# Altium PCB RF3.PcbDoc
Units mil, origin at the board's own origin, x right, y up, seen from the top; angles counter-clockwise.
Board outline 3807 x 3056 mil, 2 copper layers (Top Layer, Bottom Layer); 74 components, 47 nets, 219 pads, 1161 vias.
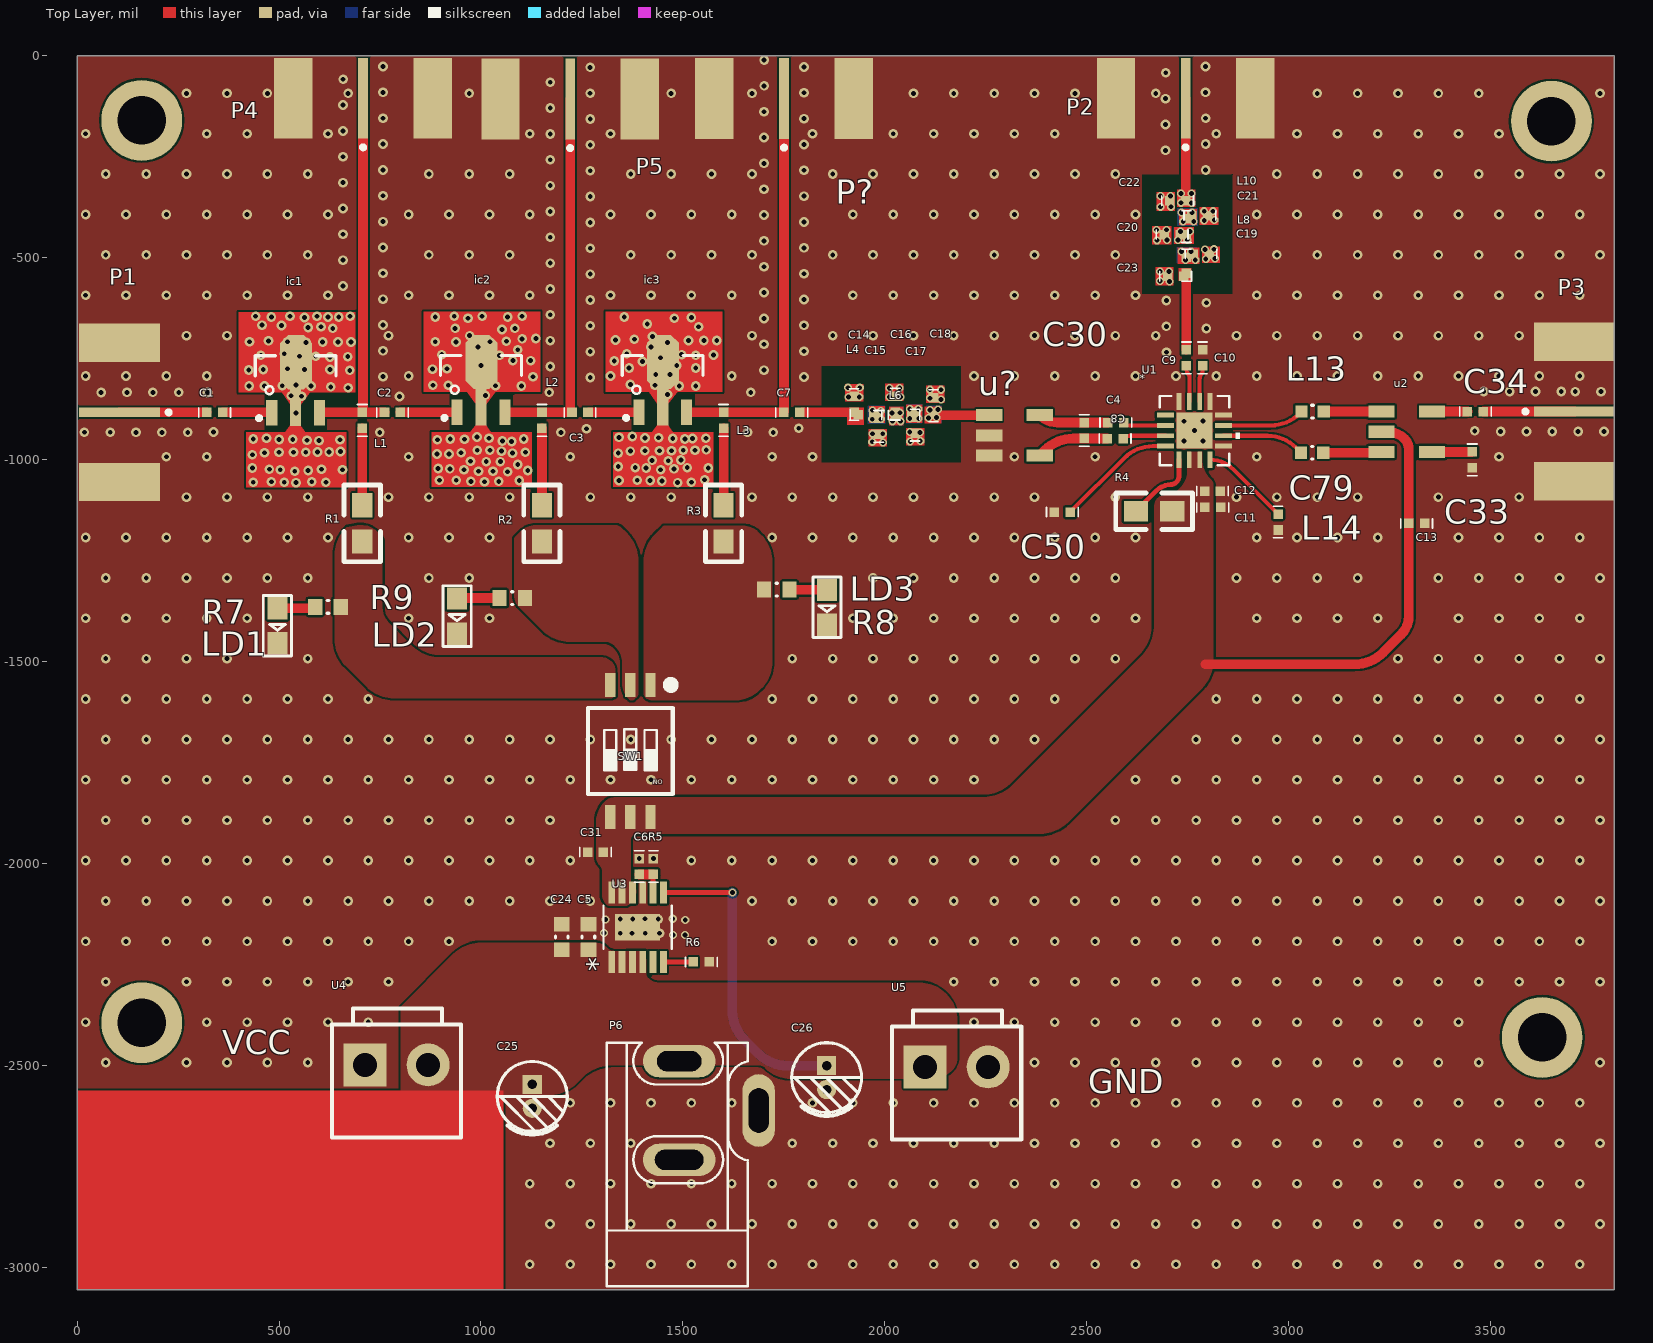
[diagram p0: Top Layer view]
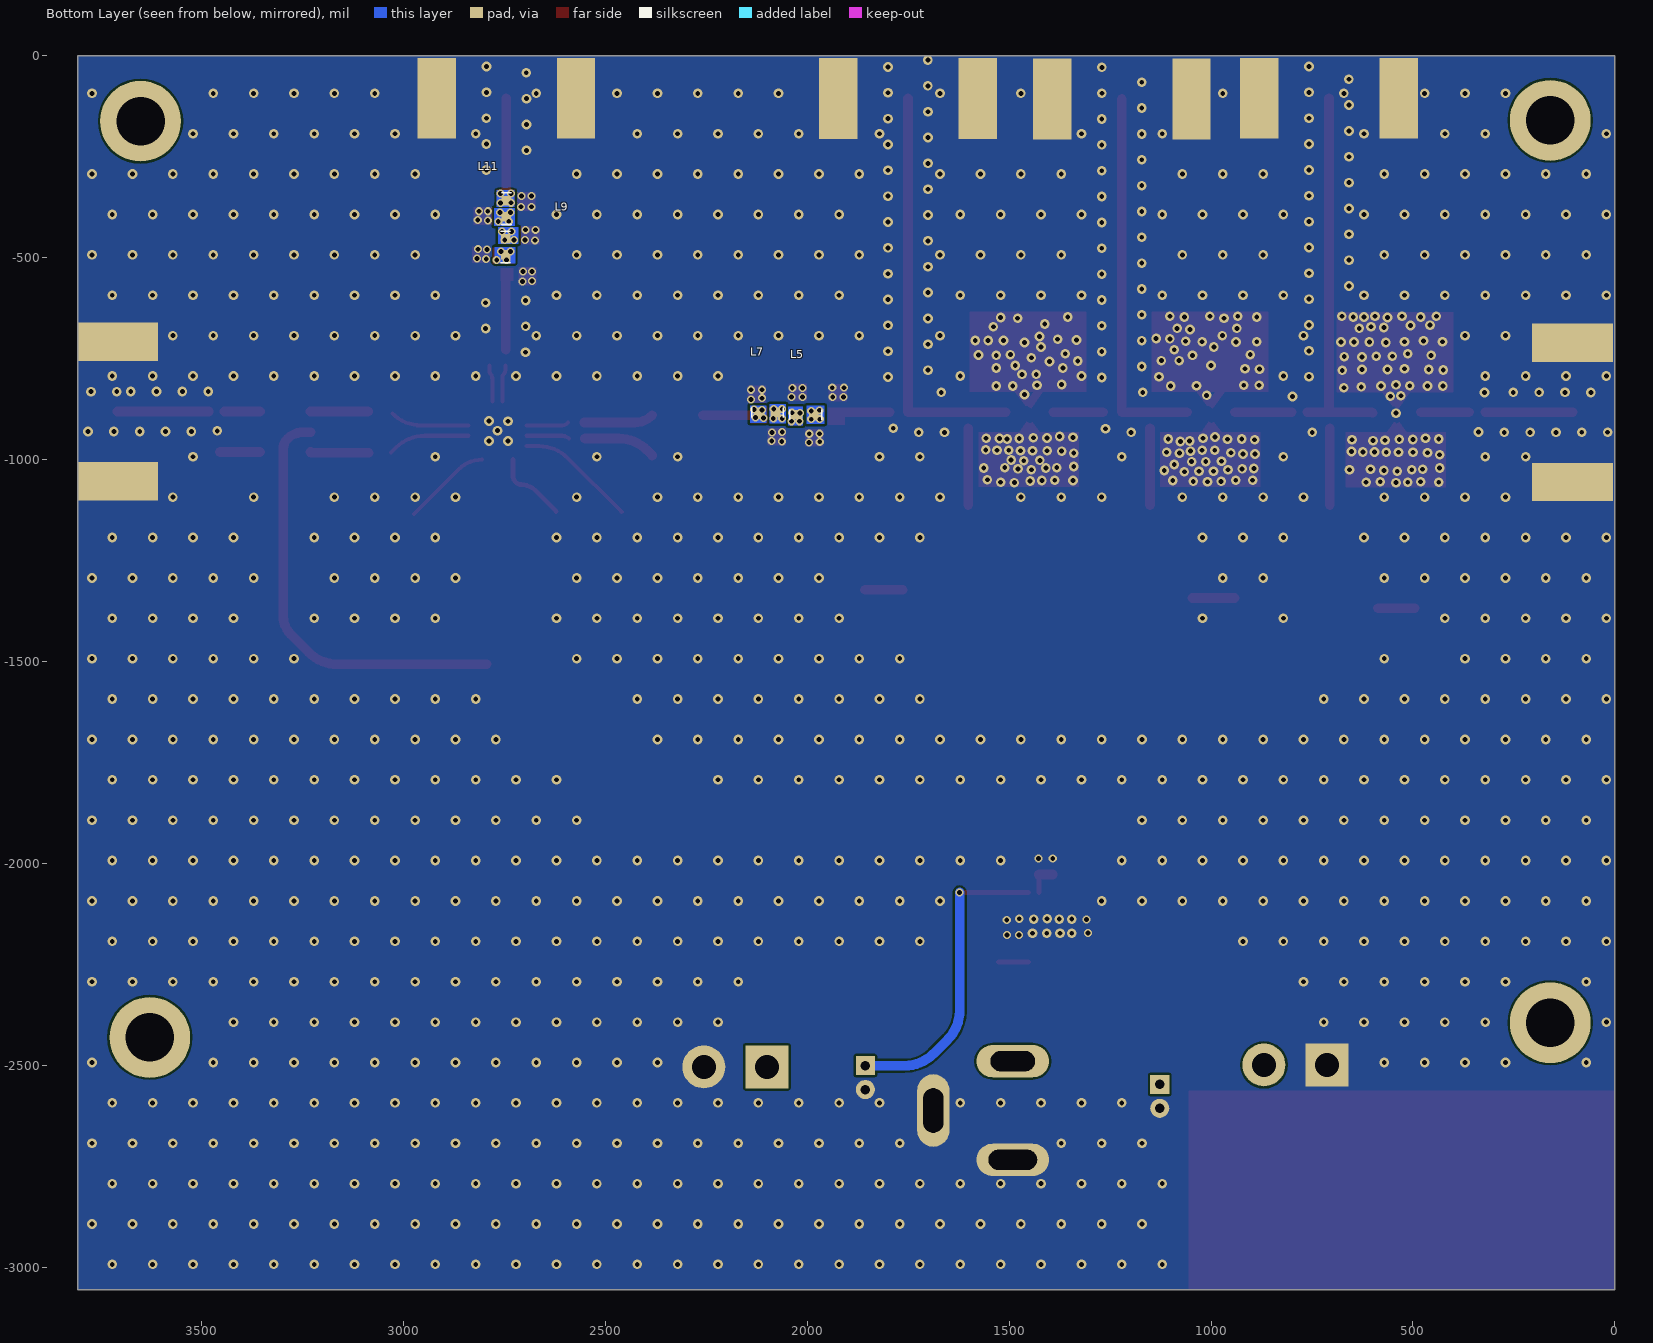
[diagram p1: Bottom Layer view, seen from below]

## Layer stack, top to bottom
Top Solder: solder mask 0.4, Solder Resist, Dk 3.5
Top Layer: signal copper 1.4
Dielectric 1: dielectric 12.6, FR-4, Dk 4.8
Bottom Layer: signal copper 1.4
Bottom Solder: solder mask 0.4, Solder Resist, Dk 3.5

## Board outline
0,-3056 3807,-3056 3807,0 0,0

## Design rules (kind name [scope] priority, off if disabled: settings)
Clearance [All] p1: gap=5 ignorepadtopadclearanceinfootprint=FALSE
DiffPairsRouting [All] p1: maxlimit=10 minlimit=10 mostfreqgap=10 toplayer_minwidth=10 toplayer_maxwidth=15 toplayer_prefwidth=10 bottomlayer_minwidth=10 bottomlayer_maxwidth=15 bottomlayer_prefwidth=10 maxuncoupledlength=500
PlaneConnect [All] p1: planeconnectstyle=Direct reliefexpansion=20 reliefentries=4 reliefconductorwidth=10 reliefairgap=10
PolygonConnect [All] p1: connectstyle=Direct reliefconductorwidth=10 reliefentries=4 polygonreliefangle="90 Angle" airgapwidth=10
RoutingVias [All] p1: holewidth=12 width=24 viastyle="Through Hole" minholewidth=12 minwidth=24 maxholewidth=12 maxwidth=24
SolderMaskExpansion [All] p1: expansion=4
Width [All] p1: maxlimit=24 minlimit=10 preferedwidth=24
28 further rules are at their usual default settings.

## Components (designator, comment, footprint, x,y, rotation, side; value= is the part's Value field where it differs from the comment)
C1 "0" 0402#1 321,-883 r0 top
C2 "0" 0402#2 761,-883 r0 top
C3 "0" 0402#1 1225.63,-883 r0 top
C4 "0.1uF" 0402#3 2552.57,-908.2 r0 top
C5 "4.7uf" 0603C 1266,-2182 r90 top
C6 "0.47uF" 0402#3 1392,-2027.37 r90 top
C7 "0" 0402#2 1750,-883 r0 top
C8 "0.1uf" 0402#3 2590.37,-948 r180 top
C9 "0" 0402#3 2746.94,-728.2 r270 top
C10 "0" 0402#3 2786.94,-767.57 r90 top
C11 "10nF" 0402#3 2831.94,-1118.2 r180 top
C12 "220uF" 0402#3 2831.31,-1078.2 r180 top
C13 "10nF" 0402#4 3337,-1158 r180 top
C14 "0" 0402#3 1924,-843.63 r270 top
C15 "0" 0402#3 1985,-937.37 r90 top
C16 "0" 0402#3 2026,-843 r270 top
C17 "0" 0402#3 2075,-934.37 r90 top
C18 "0" 0402#3 2121,-847 r270 top
C19 "0" 0402#3 2803,-491 r180 top
C20 "0" 0402#3 2692,-443 r0 top
C21 "0" 0402#3 2800,-396 r180 top
C22 "0" 0402#3 2705.63,-359 r0 top
C23 "0" 0402#3 2700.63,-546 r0 top
C24 "0" 0603C 1200,-2182 r90 top
C25 "0" "CAP 1.5*4*8" 1127,-2577 r270 top
C26 "0" "CAP 1.5*4*8" 1856,-2530.47 r270 top
C30 "0.5p" 0402#3 2493.94,-947.57 r90 top
C31 "10uF" 0402#3 1264,-1972 r0 top
C33 "0" 0402#3 3455,-981 r270 top
C34 "0" 0402#3 3443,-881 r0 top
C50 "0.1uf" 0402#3 2459.31,-1130.2 r180 top
C79 "0.1uf" 0402#3 2974,-1174.37 r90 top
ic1 "TQP369182" SOT89_M 541,-803 r0 top
ic2 "TQP369182" SOT89_M 1000.06,-802.13 r0 top
ic3 "TQP369182" SOT89_M 1450.06,-802.13 r0 top
L1 "500nH" 0402#2 706,-883 r270 top value=100uH
L2 "500nH" 0402#2 1151,-883 r270 top value=100uH
L3 "500nH" 0402#3 1601,-883 r270 top value=100uH
L4 "BEAD" 0402#3 1934,-889 r0 top value=100uH
L5 "BEAD" 0402#3 1984,-889 r0 bottom value=100uH
L6 "BEAD" 0402#3 2028,-890 r0 top value=100uH
L7 "BEAD" 0402#3 2078.63,-883 r0 bottom value=100uH
L8 "BEAD" 0402#3 2747,-538.37 r90 top value=100uH
L9 "BEAD" 0402#3 2747,-493 r90 bottom value=100uH
L10 "BEAD" 0402#3 2747,-443 r90 top value=100uH
L11 "BEAD" 0402#3 2745,-398.37 r90 bottom value=100uH
L13 "BEAD" 0603L 3059.5,-881 r0 top value=100uH
L14 "BEAD" 0603L 3058.5,-983 r180 top value=100uH
LD1 "LED" SMDLED 496.06,-1367.97 r270 top
LD2 "LED" SMDLED 941.06,-1343.97 r270 top
LD3 "LED" SMDLED 1857,-1322 r270 top
P1 "SMA" SMA 201,-888 r0 top
P2 "SMA" SMA 2740,-201 r270 top
P3 "SMA" SMA 3612,-876 r180 top
P4 "SMA" SMA 703,-201 r270 top
P5 "SMA" SMA 1216,-203 r270 top
P6 "DC005" DC10B 1661,-2909 r90 top
P? "SMA" SMA 1745.5,-202 r270 top
R1 "24" 0805 706.06,-1113 r270 top
R2 "24" 0805 1151,-1113 r270 top
R3 "24" 0805 1601.06,-1113 r270 top
R4 "1k" 0805 2711.94,-1128.2 r180 top
R5 "50K" 0402#3 1427,-1988 r270 top
R6 "0.5K" 0402#3 1565.37,-2244 r180 top
R7 "1.5K" 0603R 621,-1365 r0 top
R8 "1.5K" 0603R 1732.5,-1322 r180 top
R9 "1.5K" 0603R 1077.5,-1343 r0 top
SW1 "CSW-3P_1" "CSW1.27 SMD-3P" 1370,-1721.39 r180 top
U1 "LTC5510" QFN-16_UF 2766.94,-928.2 r0 top value=Value
u2 "TC4-19LN+" AT224 3292.5,-931 r90 top
U3 "LT3045EMSE" MSOP12-MSE-RevG_ADI 1388,-2158 r90 top
U4 "3.96" 3.96 791,-2499 r0 top
U5 "3.96" 3.96 2177.95,-2504 r0 top
u? "TC4-19LN+" AT224 2321,-940 r90 top

## Footprints (in the part's own frame and the unit in brackets; to place one, negate y for a bottom-side part, rotate by r counter-clockwise, add the part's x,y. Pads: shape width x height; smd on the part's side, far side on the other; paste and mask are expansions set on the pad)
3.96 [mm] "接插件，25V/5A"
  rect 2.7x2.7 hole 1.5: 1(-1.98,0)
  round 2.7 hole 1.5: 2(1.982,0)
  silkscreen extent -4.06,-4.57 4.07,3.56, body extent -3.98,-4.4 4.03,4.16, height 10.5
0402#1 [mil]
  rect 24x24 smd: 1(0,0) 2(39.37,0)
  silkscreen extent -19,-12 59,12
0402#2 [mil]
  rect 24x24 smd: 1(0,0)
  rect 23.62x23.62 smd: 2(39.37,0)
  silkscreen extent -19,-12 59,12
0402#3 [mil]
  rect 23.62x23.62 smd: 1(0,0) 2(39.37,0)
  silkscreen extent -19,-12 59,12
0402#4 [mil]
  rect 23.62x23.62 smd: 1(0,0)
  rect 24x24 smd: 2(39.37,0)
  silkscreen extent -19,-12 59,12
0603C [mm] "Chip Capacitor, Body 1.6x0.8mm, Height 1.0mm, IPC Medium Density"
  rect 0.9x1 smd: 1(-0.8,0) 2(0.8,0)
  silkscreen extent -0.05,-0.4 0.05,0.4, body extent -0.87,-0.48 0.88,0.47, height 1
0603L [mil] "Bead 0603L"
  rect 30x30 smd: 1(27.5,0) 2(-27.5,0)
  silkscreen extent -2,-16 2,16, body extent -34,-19 34,19, height 24
0603R [mm] "Chip Resistor, Body 1.6x0.8mm, IPC Medium Density"
  rect 0.9x1 smd: 1(-0.8,0) 2(0.8,0)
  silkscreen extent -0.05,-0.4 0.05,0.4, body extent -0.85,-0.47 0.85,0.47, height 0.6
0805 [mil]
  rect 60x50 smd: 1(0,-0.06) 2(90,-0.06)
  silkscreen extent -50,-45 140,45
AT224 [mil]
  rect 30x65 smd: 1(-50,62.5) 2(0,62.5) 3(50,62.5) 4(50,-62.5) 6(-50,-62.5)
"CAP 1.5*4*8" [mm] "脚距1.5mm直径4mm高度8mm"
  rect 1.2x1.2 hole 0.6: 1(-0.75,0)
  round 1.2 hole 0.6: 2(0.75,0)
  silkscreen extent -2.2,-2.2 2.41,2.2, body extent -2,-2 2.02,2, height 8.04
"CSW1.27 SMD-3P" [mm] "长：5.41mm，宽：5.4mm，高：2.3mm"
  rect 0.65x1.5 smd: 1(-1.27,-4.15) 2(0,-4.15) 3(1.27,-4.15) 4(1.27,4.15) 5(0,4.15) 6(-1.27,4.15)
  silkscreen extent -2.79,-4.4 2.67,2.7, body extent -2.71,-4.35 2.7,4.35, height 2.35
DC10B [mil]
  oval 80x180 hole 50 slot 110 at 90 deg: 1(419.09,170)
  oval 80x180 hole 50 slot 120 at 90 deg: 2(175,170)
  oval 180x80 hole 50 slot 110 at 0 deg: 3(297.05,-26.85)
  silkscreen extent -138,0 465,350
MSOP12-MSE-RevG_ADI [mm]
  rect 1.393x0.431 smd paste+0 mask+0: 1(-2.185,1.625) 2(-2.185,0.975) 3(-2.185,0.325) 4(-2.185,-0.325) 5(-2.185,-0.975) 6(-2.185,-1.625) 7(2.185,-1.625) 8(2.185,-0.975) 9(2.185,-0.325) 10(2.185,0.325) 11(2.185,0.975) 12(2.185,1.625)
  rect 1.651x2.845 smd paste-1.41 mask+0: EPAD(0,0)
  silkscreen extent -1.36,-2.15 1.36,2.15, body extent 0,0 0.25,0.25, height 0.25
QFN-16_UF [mm]
  rect 1.055x0.299 smd paste+0 mask+0: 1(-1.827,0.975) 2(-1.827,0.325) 3(-1.827,-0.325) 4(-1.827,-0.975) 9(1.827,-0.975) 10(1.827,-0.325) 11(1.827,0.325) 12(1.827,0.975)
  rect 0.299x1.055 smd paste+0 mask+0: 5(-0.975,-1.827) 6(-0.325,-1.827) 7(0.325,-1.827) 8(0.975,-1.827) 13(0.975,1.827) 14(0.325,1.827) 15(-0.325,1.827) 16(-0.975,1.827)
  rect 2.25x2.25 smd paste-1.112 mask+0: 17(0,0)
  silkscreen extent -2.18,-2.18 2.86,2.18, body extent 0,0 0.25,0.25, height 0.25
SMA [mil]
  rect 200x24 smd: 1(-96,5)
  rect 200x95 smd: 2(-96,-167.5) 2(-96,177.5)
  rect 200x95 smd far side: 2(-96,-167.5) 2(-96,177.5) 2(-96,177.5)
  silkscreen extent 21,0 31,10, body extent -571,-183 -9,192, height 171
SMDLED [mm]
  rect 1.4x1.27 smd: 1(0.001,-0.002) 2(2.211,-0.002)
  silkscreen extent -0.8,-0.89 3.01,0.89
SOT89_M [mm] "4.6x4.3x1.6mm(长宽高)"
  rect 0.7x1.6 smd: 1(-1.5,-2.054) 3(1.5,-2.054)
  rect 0.7x2.4 smd: 2(0,-1.676)
  oct 2x3.4 smd: 2(0.025,1.118)
  silkscreen extent -2.54,-2.52 2.54,1.52, body extent -2.3,-2.4 2.3,1.9, height 1.6

## Part data
C1 C2 C3 C4 C5 C6 C7 C8 C9 C10 C11 C12 C13 C14 C15 C16 C17 C18 C19 C20 C21 C22 C23 C24 C25 C26 C30 C31 C33 C34 C50 C79: library part C, "Capacitor"
L1 L2 L3 L4 L5 L6 L7 L8 L9 L10 L11 L13 L14: library part Inductor, "Inductor", Published=8-Jun-2000, Publisher="Altium Limited", Revision="July-2002: Re-released for DXP Platform."
LD1 LD2 LD3: "Typical RED, GREEN, YELLOW, AMBER GaAs LED", PackageDocument=Feb-2002, LatestRevisionDate=17-Jul-2002, LatestRevisionNote="Re-released for DXP Platform.", PackageReference=3.2X1.6X1.1, Published=8-Jun-2000, Publisher="Altium Limited"
P1 P2 P3 P4 P5 P?: "SMA Connector"
R1 R2 R3 R4 R5 R6 R7 R8 R9: library part Resistor, "Resistor"
SW1: "3路编码开关", BOM名称=3路编码开关, 学习资源=www.ooocke.com, 版权归属=源创客
U1: "1MHz 至 6GHz、宽带、高线性度有源混频器", Manufacturer_Part_Number=LTC5510IUF#TRPBF, Built_By=EMA_UL_Team, Copyright="Copyright (C) 2018 Accelerated Designs. All rights reserved", RefDes=RefDes, Type=DEV, Vendor="Linear Technology"
U3: "No Description Available", Built_By=SunStream, Copyright="Copyright (C) 2018 Accelerated Designs. All rights reserved", Manufacturer_Part_Number=LT3045EMSE, RefDes=RefDes, SourceLibrary=Analog_Devices_Inc_2020-09-15, Type=DEV, Vendor="Analog Devices Inc"

## Free pads (board coordinates)
  round 200 hole 120: 2(160,-2394.59) 2(160,-160) 2(3628,-2431) 2(3651,-162)

## Via types
v1: diameter 24, hole 12, Top Layer to Bottom Layer, tented both sides, 1080 vias
v2: diameter 20, hole 12, Top Layer to Bottom Layer, tented both sides, 81 vias

## Nets (pads, with @x,y where several pads share a name; then routed paths per layer and width w, separated by ;. In a path a pad name is that pad's centre, name@x,y a point inside that pad or via, vN(x,y) a via of type N, cw(c..) or ccw(c..) an arc to the next point about the centre after c; other vN are vias at no path point)
5V: C11.2 C12.2 C13.2 C31.2 R4.1 SW1.4 SW1.5 SW1.6 U1.6 U1.7 u2.2 U3.10 U3.11 U3.12 | length 1065.2
  Top Layer w24: 2794,-1507 3163.58,-1507 ccw(c3163.58,-1407) 3234.29,-1477.71 3279,-1433 ccw(c3234.16,-1388.16) 3297.57,-1388.16 3297.57,-973.87 ccw(c3261.28,-973.87) 3286.94,-948.2 ccw(c3248.32,-986.83) 3248.32,-932.2 u2.2@3229.94,-932.2
GND: C5.2 C6.2 C10.2 C11.1 C12.1 C13.1 C14.1 C15.1 C16.1 C17.1 C18.1 C19.1 C20.1 C21.1 C22.1 C23.1 C24.2 C25.2 C26.2 C31.1 C33.2 C50.2 C79.1 ic1.2 ic2.2 ic3.2 LD1.2 LD2.2 LD3.2 P1.2 P2.2 P3.2 P4.2 P5.2 P6.2 P6.3 P?.2 R5.1 R6.1 U1.9 U1.12 U1.13 U1.16 U1.17 U3.9 U3.EPAD U4.1 U5.2 u?.1 u?.2
  other v1: 1121,-2993 1221,-2993 1321,-2993 1421,-2993 1521,-2993 1621,-2993 1721,-2993 1821,-2993 1921,-2993 2021,-2993 2121,-2993 2221,-2993 2321,-2993 2421,-2993 2521,-2993 2621,-2993 2721,-2993 2821,-2993 2921,-2993 3021,-2993 3121,-2993 3221,-2993 3321,-2993 3421,-2993 3521,-2993 3621,-2993 3721,-2993 1171,-2893 1271,-2893 1371,-2893 1471,-2893 1571,-2893 1671,-2893 1771,-2893 1871,-2893 1971,-2893 2071,-2893 2171,-2893 2271,-2893 2371,-2893 2471,-2893 2571,-2893 2671,-2893 2771,-2893 2871,-2893 2971,-2893 3071,-2893 3171,-2893 3271,-2893 3371,-2893 3471,-2893 3571,-2893 3671,-2893 3771,-2893 1121,-2793 1221,-2793 1321,-2793 1421,-2793 1521,-2793 1621,-2793 1721,-2793 1821,-2793 1921,-2793 2021,-2793 2121,-2793 2221,-2793 2321,-2793 2421,-2793 2521,-2793 2621,-2793 2721,-2793 2821,-2793 2921,-2793 3021,-2793 3121,-2793 3221,-2793 3321,-2793 3421,-2793 3521,-2793 3621,-2793 3721,-2793 1171,-2693 1271,-2693 1371,-2693 1771,-2693 1871,-2693 1971,-2693 2071,-2693 2171,-2693 2271,-2693 2371,-2693 2471,-2693 2571,-2693 2671,-2693 2771,-2693 2871,-2693 2971,-2693 3071,-2693 3171,-2693 3271,-2693 3371,-2693 3471,-2693 3571,-2693 3671,-2693 3771,-2693 1221,-2593 1321,-2593 1421,-2593 1521,-2593 1621,-2593 1821,-2593 1921,-2593 2021,-2593 2121,-2593 2221,-2593 2321,-2593 2421,-2593 2521,-2593 2621,-2593 2721,-2593 2821,-2593 2921,-2593 3021,-2593 3121,-2593 3221,-2593 3321,-2593 3421,-2593 3521,-2593 3621,-2593 3721,-2593 71,-2493 271,-2493 371,-2493 471,-2493 571,-2493 2371,-2493 2471,-2493 2571,-2493 2671,-2493 2771,-2493 2871,-2493 2971,-2493 3071,-2493 3171,-2493 3271,-2493 3371,-2493 3471,-2493 3771,-2493 21,-2393 321,-2393 421,-2393 521,-2393 621,-2393 721,-2393 2221,-2393 2321,-2393 2421,-2393 2521,-2393 2621,-2393 2721,-2393 2821,-2393 2921,-2393 3021,-2393 3121,-2393 3221,-2393 3321,-2393 3421,-2393 71,-2293 271,-2293 371,-2293 471,-2293 571,-2293 671,-2293 771,-2293 2171,-2293 2271,-2293 2371,-2293 2471,-2293 2571,-2293 2671,-2293 2771,-2293 2871,-2293 2971,-2293 3071,-2293 3171,-2293 3271,-2293 3371,-2293 3471,-2293 3571,-2293 3671,-2293 3771,-2293 21,-2193 121,-2193 221,-2193 321,-2193 421,-2193 521,-2193 621,-2193 721,-2193 821,-2193 921,-2193 1721,-2193 1821,-2193 1921,-2193 2021,-2193 2121,-2193 2221,-2193 2321,-2193 2421,-2193 2521,-2193 2621,-2193 2721,-2193 2821,-2193 2921,-2193 3021,-2193 3121,-2193 3221,-2193 3321,-2193 3421,-2193 3521,-2193 3621,-2193 3721,-2193 1345,-2173 1374,-2173 1407,-2173 1442,-2173 1345,-2138 1376,-2138 1439,-2138 1406,-2137 71,-2093 171,-2093 271,-2093 371,-2093 471,-2093 571,-2093 671,-2093 771,-2093 871,-2093 971,-2093 1071,-2093 1171,-2093 1271,-2093 1671,-2093 1771,-2093 1871,-2093 1971,-2093 2071,-2093 2171,-2093 2271,-2093 2371,-2093 2471,-2093 2571,-2093 2671,-2093 2771,-2093 2871,-2093 2971,-2093 3071,-2093 3171,-2093 3271,-2093 3371,-2093 3471,-2093 3571,-2093 3671,-2093 3771,-2093 21,-1993 121,-1993 221,-1993 321,-1993 421,-1993 521,-1993 621,-1993 721,-1993 821,-1993 921,-1993 1021,-1993 1121,-1993 1221,-1993 1521,-1993 1621,-1993 1721,-1993 1821,-1993 1921,-1993 2021,-1993 2121,-1993 2221,-1993 2321,-1993 2421,-1993 2521,-1993 2621,-1993 2721,-1993 2821,-1993 2921,-1993 3021,-1993 3121,-1993 3221,-1993 3321,-1993 3421,-1993 3521,-1993 3621,-1993 3721,-1993 71,-1893 171,-1893 271,-1893 371,-1893 471,-1893 571,-1893 671,-1893 771,-1893 871,-1893 971,-1893 1071,-1893 1171,-1893 2571,-1893 2671,-1893 2771,-1893 2871,-1893 2971,-1893 3071,-1893 3171,-1893 3271,-1893 3371,-1893 3471,-1893 3571,-1893 3671,-1893 3771,-1893 21,-1793 121,-1793 221,-1793 321,-1793 421,-1793 521,-1793 621,-1793 721,-1793 821,-1793 921,-1793 1021,-1793 1121,-1793 1221,-1793 1321,-1793 1421,-1793 1521,-1793 1621,-1793 1721,-1793 1821,-1793 1921,-1793 2021,-1793 2121,-1793 2221,-1793 2621,-1793 2721,-1793 2821,-1793 2921,-1793 3021,-1793 3121,-1793 3221,-1793 3321,-1793 3421,-1793 3521,-1793 3621,-1793 3721,-1793 71,-1693 171,-1693 271,-1693 371,-1693 471,-1693 571,-1693 671,-1693 771,-1693 871,-1693 971,-1693 1071,-1693 1171,-1693 1271,-1693 1371,-1693 1471,-1693 1571,-1693 1671,-1693 1771,-1693 1871,-1693 1971,-1693 2071,-1693 2171,-1693 2271,-1693 2371,-1693 2771,-1693 2871,-1693 2971,-1693 3071,-1693 3171,-1693 3271,-1693 3371,-1693 3471,-1693 3571,-1693 3671,-1693 3771,-1693 21,-1593 121,-1593 221,-1593 321,-1593 421,-1593 521,-1593 621,-1593 721,-1593 1721,-1593 1821,-1593 1921,-1593 2021,-1593 2121,-1593 2221,-1593 2321,-1593 2421,-1593 2821,-1593 2921,-1593 3021,-1593 3121,-1593 3221,-1593 3321,-1593 3421,-1593 3521,-1593 3621,-1593 3721,-1593 71,-1493 171,-1493 271,-1493 371,-1493 571,-1493 1771,-1493 1871,-1493 1971,-1493 2071,-1493 2171,-1493 2271,-1493 2371,-1493 2471,-1493 2571,-1493 3271,-1493 3371,-1493 3471,-1493 3571,-1493 3671,-1493 3771,-1493 21,-1393 121,-1393 221,-1393 321,-1393 421,-1393 821,-1393 1021,-1393 1921,-1393 2021,-1393 2121,-1393 2221,-1393 2321,-1393 2421,-1393 2521,-1393 2621,-1393 2921,-1393 3021,-1393 3121,-1393 3221,-1393 3421,-1393 3521,-1393 3621,-1393 3721,-1393 71,-1293 171,-1293 271,-1293 371,-1293 471,-1293 571,-1293 871,-1293 971,-1293 1971,-1293 2071,-1293 2171,-1293 2271,-1293 2371,-1293 2471,-1293 2571,-1293 2871,-1293 2971,-1293 3071,-1293 3171,-1293 3371,-1293 3471,-1293 3571,-1293 3671,-1293 3771,-1293 21,-1193 121,-1193 221,-1193 321,-1193 421,-1193 521,-1193 621,-1193 821,-1193 921,-1193 1021,-1193 1721,-1193 1821,-1193 1921,-1193 2021,-1193 2121,-1193 2221,-1193 2321,-1193 2421,-1193 2521,-1193 2621,-1193 2921,-1193 3021,-1193 3121,-1193 3221,-1193 3421,-1193 3521,-1193 3621,-1193 3721,-1193 271,-1093 371,-1093 471,-1093 571,-1093 771,-1093 871,-1093 971,-1093 1071,-1093 1271,-1093 1371,-1093 1471,-1093 1671,-1093 1771,-1093 1871,-1093 1971,-1093 2071,-1093 2171,-1093 2271,-1093 2371,-1093 2571,-1093 2871,-1093 2971,-1093 3071,-1093 3171,-1093 3371,-1093 3571,-1093 542,-1057 1487,-1057 436,-1056 513,-1056 616,-1056 1521,-1056 481,-1055 581,-1055 1009,-1055 975,-1054 1044,-1054 1448,-1053 1095,-1052 1342,-1052 1419,-1052 897,-1051 939,-1051 1387,-1051 1554,-1050 1066,-1030 539,-1029 994,-1029 1030,-1029 572,-1027 1116,-1027 503,-1025 657,-1025 958,-1025 1445,-1025 476,-1024 605,-1024 923,-1023 1478,-1023 894,-1022 434,-1021 1409,-1021 1563,-1021 1382,-1020 1511,-1020 1340,-1017 1091,-1012 1013,-1005 1048,-1005 974,-1004 1464,-1003 1424,-1002 1495,-1001 221,-993 321,-993 821,-993 1221,-993 1721,-993 1821,-993 2321,-993 2521,-993 2921,-993 3521,-993 434,-988 891,-986 921,-986 1078,-984 1340,-984 464,-983 951,-983 500,-982 536,-982 566,-982 1110,-982 595,-981 624,-981 652,-980 1051,-979 1370,-979 1406,-978 1442,-978 1472,-978 991,-977 1022,-977 1501,-977 1530,-977 1558,-976 1076,-955 1053,-954 2740.94,-954.2 2787.94,-954.2 599,-953 569,-952 651,-951 892,-951 500.27,-950.39 534,-950 959.32,-949.52 436,-949 924,-949 1106,-949 1505,-949 1475,-948 1524,-948 469,-947 1020,-947 1557,-947 1406.27,-946.39 1440,-946 1342,-945 990,-944 1375,-943 145.85,-932.55 209.85,-932.55 273.85,-932.55 749.25,-932.55 1197.97,-932.55 1659.96,-932.55 1723.96,-932.55 17.85,-932.32 81.85,-932.32 337.84,-931.68 3525.1,-930.55 3589.1,-930.55 3653.1,-930.55 3717.1,-930.32 3781.1,-930.32 3461.13,-928.89 2766.94,-928.2 1261.32,-923.46 1787.14,-922.35 2740.94,-905.2 2787.94,-904.2 542,-885 798.45,-843.89 556,-843 530,-842 1011,-841 1462,-839 59.47,-833.68 322.79,-833.68 123.47,-833.45 187.47,-833.45 251.47,-833.45 1169.03,-833.45 1668.25,-833.45 3709.79,-831.68 3773.79,-831.68 3483.33,-831.45 3547.33,-831.45 3611.33,-831.45 3675.33,-831.45 671,-822 628,-820 426,-818 464,-818 579,-818 1100,-818 1491,-818 1532,-818 508,-817 1036,-817 881,-816 919,-816 1431,-816 542,-815 1370,-814 1270.55,-796.67 1800.05,-795.67 757.55,-794.67 1129,-795 21,-793 121,-793 221,-793 321,-793 821,-793 1321,-793 1621,-793 2221,-793 2321,-793 2421,-793 2521,-793 2621,-793 2721,-793 2821,-793 2921,-793 3021,-793 3121,-793 3221,-793 3321,-793 3421,-793 3521,-793 3621,-793 3721,-793 1433,-789 1468,-789 675,-779 425,-778 1700.95,-778.43 461,-777 563,-777 626,-777 880,-776 521,-775 916,-775 1367,-773 1532,-773 1171.45,-769.49 1000,-767 1485,-767 1400,-757 1330,-756 1079,-755 1123,-755 1445,-748 626,-746 670,-745 551,-744 591,-744 455,-742 1046,-742 1532,-742 1576,-741 903,-740 1497,-740 513,-738 1361,-738 2697.81,-734.05 1270.55,-732.67 1800.05,-731.67 757.55,-730.67 1091,-728 993,-721 1421,-721 1700.95,-714.43 567,-710 1462,-710 608,-709 646,-709 678,-709 938,-709 427,-708 521,-708 887,-708 1022,-708 1063,-707 474,-706 1171.45,-705.49 1514,-705 1552,-705 1584,-705 1333,-704 1380,-702 1102,-701 1136,-700 1425,-695 271,-693 371,-693 771,-693 972,-693 1671,-693 1871,-693 1971,-693 2071,-693 2171,-693 2271,-693 2371,-693 2471,-693 2571,-693 2671,-693 2871,-693 2971,-693 3071,-693 3171,-693 3271,-693 3371,-693 3471,-693 3571,-693 1052,-678 2796.5,-675.58 633,-675 936,-675 1084,-675 572,-673 604,-671 1539,-671 2697.39,-670.05 1270.55,-668.67 506,-668 1800.05,-667.67 458,-667 757.55,-666.67 1412,-664 968,-650 1479,-650 1700.95,-650.43 563,-648 1521,-648 481,-647 621,-647 648,-647 887,-647 1066,-647 1355,-647 442,-645 527,-645 594,-645 676,-645 934,-645 1003,-645 1102,-645 1171.45,-641.49 2796.5,-611.58 2697.39,-606.05 1270.55,-604.67 1800.05,-603.67 757.55,-602.67 21,-593 121,-593 221,-593 321,-593 421,-593 521,-593 621,-593 821,-593 921,-593 1021,-593 1121,-593 1321,-593 1421,-593 1521,-593 1621,-593 1921,-593 2021,-593 2121,-593 2221,-593 2321,-593 2421,-593 2521,-593 2621,-593 2921,-593 3021,-593 3121,-593 3221,-593 3321,-593 3421,-593 3521,-593 3621,-593 3721,-593 1700.95,-586.43 1171.45,-577.49 658.45,-570.1 1270.55,-540.67 1800.05,-539.67 757.55,-538.67 1700.95,-522.43 1171.45,-513.49 658.45,-506.1 71,-493 171,-493 271,-493 371,-493 471,-493 571,-493 871,-493 971,-493 1071,-493 1371,-493 1471,-493 1571,-493 1671,-493 1871,-493 1971,-493 2071,-493 2171,-493 2271,-493 2371,-493 2471,-493 2571,-493 2971,-493 3071,-493 3171,-493 3271,-493 3371,-493 3471,-493 3571,-493 3671,-493 3771,-493 1270.55,-476.67 1800.05,-475.67 757.55,-474.67 1700.95,-458.43 1171.45,-449.49 658.45,-442.1 1270.55,-412.67 1800.05,-411.67 757.55,-410.67 1700.95,-394.43 21,-393 121,-393 221,-393 321,-393 421,-393 521,-393 621,-393 821,-393 921,-393 1021,-393 1121,-393 1321,-393 1421,-393 1521,-393 1621,-393 1921,-393 2021,-393 2121,-393 2221,-393 2321,-393 2421,-393 2521,-393 2621,-393 2921,-393 3021,-393 3121,-393 3221,-393 3321,-393 3421,-393 3521,-393 3621,-393 3721,-393 1171.45,-385.49 658.45,-378.1 1270.55,-348.67 1800.05,-347.67 757.55,-346.67 1700.95,-330.43 1171.45,-321.49 658.45,-314.1 71,-293 171,-293 271,-293 371,-293 471,-293 571,-293 871,-293 971,-293 1071,-293 1371,-293 1471,-293 1571,-293 1671,-293 1871,-293 1971,-293 2071,-293 2171,-293 2271,-293 2371,-293 2471,-293 2571,-293 2971,-293 3071,-293 3171,-293 3271,-293 3371,-293 3471,-293 3571,-293 3671,-293 3771,-293 1270.55,-284.67 1800.05,-283.67 757.55,-282.67 2794.55,-282.67 1700.95,-266.43 1171.45,-257.49 658.45,-250.1 2695.45,-234.2 1270.55,-220.67 1800.05,-219.67 757.55,-218.67 2794.55,-218.67 1700.95,-202.43 21,-193 321,-193 421,-193 621,-193 1121,-193 1171.45,-193.49 1321,-193 1821,-193 2021,-193 2121,-193 2221,-193 2321,-193 2421,-193 2821,-193 3021,-193 3121,-193 3221,-193 3321,-193 3421,-193 3521,-193 658.45,-186.1 2695.45,-170.2 1270.55,-156.67 1800.05,-155.67 757.55,-154.67 2794.55,-154.67 1700.95,-138.43 1171.45,-129.49 658.45,-122.1 2695.45,-106.2 271,-93 371,-93 471,-93 671,-93 971,-93 1270.32,-92.67 1471,-93 1671,-93 2071,-93 2171,-93 2271,-93 2371,-93 2471,-93 2671,-93 3071,-93 3171,-93 3271,-93 3371,-93 3471,-93 3771,-93 1799.82,-91.67 757.32,-90.67 2794.32,-90.67 1701.18,-74.43 1171.68,-65.49 658.68,-58.1 2695.68,-42.2 1270.32,-28.67 1799.82,-27.67 757.32,-26.67 2794.32,-26.67 1701.18,-10.43
  other v2: 1476,-2177 1505,-2177 1305,-2172 1506,-2140 1308,-2139 1475,-2137 1392,-1988 1427,-1988 1996,-958 1969,-956 2063,-955 2088,-954 1970,-936 1995,-936 2087,-933 2062,-932 2139,-851 2112,-848 1910,-845 1937,-845 2012,-845 2039,-845 2112,-827 2139,-827 2012,-823 2037,-823 1909,-822 1938,-822 2705,-559 2682,-558 2682,-534 2704,-534 2795,-503 2818,-502 2793,-480 2815,-479 2674,-457 2699,-456 2673,-431 2698,-431 2791,-408 2816,-407 2791,-385 2813,-385 2683,-374 2709,-374 2683,-347 2708,-347
NetC1_1: C1.1 P1.1 | length 216
  Top Layer w24: P1.1 C1.1
NetC1_2: C1.2 ic1.1 | length 120.7
  Top Layer w24: C1.2 ic1.1@481.07,-883
NetC2_1: C2.1 ic1.3 L1.1 P4.1 | length 939.8
  Top Layer w24: ic1.3 600.93,-883 L1.1 ; P4.1 708,-878.17 cw(c701.17,-878.17) L1.1 ; C2.1 L1.1
NetC2_2: C2.2 ic2.1 | length 140.6
  Top Layer w24: C2.2 ic2.1
NetC3_1: C3.1 ic2.3 L2.1 P5.1 | length 935.5
  Top Layer w24: ic2.3 L2.1 C3.1@1219,-883 ; C3.1@1221,-882.63 P5.1
NetC3_2: C3.2 ic3.1 | length 124
  Top Layer w24: C3.2@1267,-883 ic3.1
NetC4_1: C4.1 C30.2 u?.4 | length 173.9
  Top Layer w24: u?.4 ccw(c2427.45,-846.05) 2427.45,-908.2 C30.2 C4.1
NetC4_2: C4.2 U1.2 | length 105
  Top Layer w10: C4.2 ccw(c2609.34,-890.81) 2609.34,-915.41 U1.2
NetC6_1: C6.1 R5.2 U3.8 | length 79.8
  Top Layer w12: U3.8 R5.2@1426.39,-2028.85
  Top Layer w24: C6.1 R5.2 ccw(c1428.48,-2028.85) R5.2@1426.39,-2028.85
NetC7_1: C7.1 ic3.3 L3.1 P?.1 | length 1018
  Top Layer w24: ic3.3 L3.1 C7.1 ccw(c1748.79,-881.79) 1750.5,-881.79 P?.1
NetC7_2: C7.2 C14.2 L4.1 | length 139.2
  Top Layer w24: C7.2@1796.37,-883 1919.51,-883 cw(c1919.51,-903.49) L4.1
NetC8_1: C8.1 U1.3 | length 106.5
  Top Layer w10: C8.1 cw(c2607.27,-964.9) 2607.27,-941 U1.3
NetC8_2: C8.2 C30.1 u?.6 | length 180.9
  Top Layer w24: u?.6 2396.64,-976.86 cw(c2467.35,-1047.57) 2467.35,-947.57 C30.1 ccw(c2494.97,-946.55) 2494.97,-948 C8.2
NetC9_1: C9.1 C23.2 L8.1 | length 189.8
  Top Layer w24: C9.1 L8.1@2746.94,-538.43
NetC9_2: C9.2 U1.15 | length 90.6
  Top Layer w10: C9.2 2746.94,-774.2 ccw(c2771.54,-774.2) 2754.15,-791.59 U1.15
NetC10_1: C10.1 U1.14 | length 90.6
  Top Layer w10: U1.14 2779.74,-801.78 cw(c2804.34,-801.78) 2786.94,-784.39 C10.1
NetC15_2: C15.2 L4.2 L5.1
  other v2: 1969,-900 1990,-900 1990,-880 1970,-878
NetC16_2: C16.2 L5.2 L6.1
  other v2: 2019,-905 2039,-905 2018,-885 2038,-884
NetC17_2: C17.2 L6.2 L7.1
  other v2: 2062,-898 2084,-898 2062,-875 2083,-875
NetC18_2: C18.2 L7.2 u?.3 | length 142.8
  Top Layer w24: C18.2@2124.94,-888 cw(c2124.94,-882.43) C18.2 ccw(c2129.76,-877.61) 2129.76,-890 u?.3
  other v2: 2108,-897 2128,-896 2112,-877 2132,-876
NetC19_2: C19.2 L8.2 L9.1
  other v2: 2745,-506 2769,-506 2735,-485 2758,-485
NetC20_2: C20.2 L9.2 L10.1
  other v2: 2726,-456 2749,-456 2732,-435 2756,-435
NetC21_2: C21.2 L10.2 L11.1
  other v2: 2739,-410 2765,-410 2735,-388 2761,-388
NetC22_2: C22.2 L11.2 P2.1 | length 254
  Top Layer w24: C22.2 P2.1
  other v2: 2760,-365 2734,-364 2734,-341 2760,-341
NetC33_1: C33.1 u2.6 | length 100
  Top Layer w24: u2.6 C33.1
NetC34_1: C34.1 u2.4 | length 88
  Top Layer w24: u2.4 C34.1
NetC34_2: C34.2 P3.1 | length 225.6
  Top Layer w24: C34.2 P3.1
NetC50_1: C50.1 U1.4 | length 299.2
  Top Layer w10: C50.1 2593.64,-995.88 cw(c2664.35,-1066.59) 2664.35,-966.59 U1.4
NetC79_2: C79.2 U1.8 | length 221
  Top Layer w10: U1.8 cw(c2805.33,-1081.8) 2863.06,-1024.06 C79.2
NetL1_2: L1.2 R1.1 | length 190.6
  Top Layer w24: R1.1 L1.2
NetL2_2: L2.2 R2.1 | length 190.6
  Top Layer w24: R2.1@1151,-1112.94 L2.2
NetL3_2: L3.2 R3.1 | length 190.6
  Top Layer w24: R3.1 L3.2
NetL13_1: L13.1 u2.3 | length 143
  Top Layer w24: L13.1 u2.3
NetL13_2: L13.2 U1.11 | length 195.8
  Top Layer w10: U1.11 2956.17,-915.41 ccw(c2956.17,-815.41) L13.2@3026.88,-886.12
NetL14_2: L14.2 u2.1 | length 146.7
  Top Layer w24: L14.2 3225.17,-983 ccw(c3225.17,-976.17) u2.1 ; u2.1@3228.02,-983 ccw(c3228.02,-980.28) u2.1@3229.94,-982.2
NetLD1_1: LD1.1 R7.1 | length 90.5
  Top Layer w24: LD1.1 R7.1@586.5,-1368
NetLD2_1: LD2.1 R9.1 | length 104
  Top Layer w24: LD2.1@942,-1343 R9.1
NetLD3_1: LD3.1 R8.1 | length 92.9
  Top Layer w24: R8.1 LD3.1
NetR1_2: R1.2 R7.2 SW1.3
NetR2_2: R2.2 R9.2 SW1.2
NetR3_2: R3.2 R8.2 SW1.1
NetR4_2: R4.2 U1.5 | length 184.7
  Top Layer w12: R4.2 2674.04,-1076.05 cw(c2708.42,-1110.43) 2708.42,-1061.81 ccw(c2708.42,-1042.68) 2721.94,-1056.2 ccw(c2705.98,-1040.24) 2728.56,-1040.24 U1.5
NetR6_2: R6.2 U3.6 | length 74
  Top Layer w12: U3.6 R6.2
out: L14.1 U1.10 | length 205.2
  Top Layer w10: U1.10 2947.58,-941 cw(c2947.58,-1041) 3018.29,-970.29 L14.1
VCC: C5.1 C24.1 C25.1 C26.1 P6.1 U3.1 U3.2 U3.3 U3.4 U3.7 U4.2 U5.1 | length 757
  Top Layer w12: U3.7 v2(1622.53,-2071.98)
  Bottom Layer w24: v2(1622.53,-2071.98) 1622.53,-2365.11 ccw(c1722.53,-2365.11) 1651.82,-2435.82 1687.66,-2471.66 ccw(c1758.37,-2400.94) 1758.37,-2500.94 C26.1@1843.96,-2500.94
pads on no net: U1.1 U3.5

## Polygon pours and split planes (outlines as drawn)
NetR3_2 on Top Layer "Top Layer-No Net" (solid, pour order 22): 1649.79,-1164 cw(c1649.79,-1215.21) 1686,-1179 1691.71,-1184.71 cw(c1621,-1255.42) 1721,-1255.42 1721,-1498.58 cw(c1621,-1498.58) 1691.71,-1569.29 1689,-1572 cw(c1631.06,-1514.06) 1631.06,-1596 1422.07,-1596 cw(c1422.07,-1578.93) 1410,-1591 1407.24,-1588.24 cw(c1417.49,-1578) 1403,-1578 1403,-1254.42 cw(c1503,-1254.42) 1432.29,-1183.71 1450,-1166 cw(c1454.83,-1170.83) 1454.83,-1164
NetR2_2 on Top Layer "Top Layer-No Net" (solid, pour order 20): 1135,-1163 ccw(c1135,-1216.11) 1097.44,-1178.56 1085,-1191 ccw(c1089.83,-1195.83) 1083,-1195.83 1083,-1337.03 ccw(c1123.97,-1337.03) 1095,-1366 1150.71,-1421.71 ccw(c1221.42,-1351) 1221.42,-1451 1304.03,-1451 cw(c1304.03,-1491.97) 1333,-1463 cw(c1291.96,-1504.04) 1350,-1504.04 1350,-1552.96 ccw(c1408.04,-1552.96) 1367,-1594 ccw(c1371.83,-1589.17) 1371.83,-1596 1375,-1596 ccw(c1375,-1588.76) 1380.12,-1593.88 1386,-1588 ccw(c1376.34,-1578.34) 1390,-1578.34 1390,-1252.42 ccw(c1290,-1252.42) 1360.71,-1181.71 1346,-1167 ccw(c1336.34,-1176.66) 1336.34,-1163
NetR1_2 on Top Layer "Top Layer-No Net" (solid, pour order 18): 668,-1167 667.29,-1167.71 ccw(c738,-1238.42) 638,-1238.42 638,-1442.58 ccw(c738,-1442.58) 667.29,-1513.29 715.71,-1561.71 ccw(c786.42,-1491) 786.42,-1591 1322,-1591 ccw(c1322,-1583.76) 1327.12,-1588.88 1329,-1587 ccw(c1321.76,-1579.76) 1332,-1579.76 1332,-1521.73 ccw(c1301.27,-1521.73) 1323,-1500 ccw(c1298.86,-1524.14) 1298.86,-1490 899.42,-1490 cw(c899.42,-1390) 828.71,-1460.71 771,-1403 cw(c807.21,-1366.79) 756,-1366.79 756,-1205 ccw(c724.62,-1205) 746.81,-1182.81 742,-1178 ccw(c703.37,-1216.63) 703.37,-1162 694,-1162
5V on Top Layer "Top Layer-No Net" (solid, pour order 8): 2748.94,-980.2 2748.94,-1032.41 cw(c2701.15,-1032.41) 2734.94,-1066.2 2726.38,-1074.77 cw(c2693.94,-1042.33) 2693.94,-1088.2 ccw(c2693.94,-1114.76) 2675.17,-1095.98 2674.94,-1096.2 ccw(c2694.26,-1115.52) 2666.94,-1115.52 2666.94,-1186.2 2765.07,-1186.2 ccw(c2765.07,-1121.33) 2810.94,-1167.2 ccw(c2803.7,-1159.96) 2813.94,-1159.96 2813.94,-1064.2 ccw(c2792.22,-1064.2) 2807.58,-1048.84 2805.94,-1047.2 cw(c2854.23,-998.92) 2785.94,-998.92 2785.94,-980.2
VCC on Top Layer "Top Layer-No Net" (solid, pour order 32): 802,-2588 cw(c804.41,-2585.59) 801,-2585.59 801,-2355 930.71,-2225.29 cw(c1001.42,-2296) 1001.42,-2196 1285,-2196 cw(c1285,-2232.21) 1310.61,-2206.61 1313.22,-2209.22 ccw(c1332,-2190.44) 1332,-2217 1390.34,-2217 cw(c1390.34,-2230.66) 1400,-2221 cw(c1378.27,-2242.73) 1409,-2242.73 1409,-2271 ccw(c1428.31,-2271) 1414.66,-2284.66 1415,-2285 ccw(c1439.14,-2260.86) 1439.14,-2295 2084.4,-2295 cw(c2084.4,-2390.6) 2152,-2323 cw(c2084.4,-2390.6) 2180,-2390.6 2180,-2480 cw(c2134.13,-2480) 2166.57,-2512.44 2164.38,-2514.62 cw(c2120,-2470.23) 2120,-2533 1766.77,-2533 cw(c1766.77,-2444.23) 1704,-2507 ccw(c1687.1,-2523.9) 1687.1,-2500 1322.42,-2500 ccw(c1322.42,-2600) 1251.71,-2529.29 1236.29,-2544.71 cw(c1165.58,-2474) 1165.58,-2574 833.73,-2574 ccw(c833.73,-2604.73) 812,-2583
5V on Top Layer "Top Layer-No Net" (solid, pour order 42): 1370,-2046 1377.64,-2053.64 cw(c1362.27,-2069) 1384,-2069 cw(c1347.79,-2069) 1373.39,-2094.61 1367,-2101 cw(c1357.34,-2091.34) 1357.34,-2105 1321.07,-2105 cw(c1321.07,-2087.93) 1309,-2100 cw(c1330.73,-2078.27) 1300,-2078.27 1300,-2019.49 ccw(c1279.51,-2019.49) 1294,-2005 cw(c1313.31,-1985.69) 1286,-1985.69 1286,-1895.28 cw(c1354.28,-1895.28) 1306,-1847 cw(c1332.56,-1873.56) 1332.56,-1836 2244.58,-1836 ccw(c2244.58,-1736) 2315.29,-1806.71 2637.66,-1484.34 ccw(c2566.94,-1413.63) 2666.94,-1413.63 2666.94,-1178.82 2742.76,-1178.82 ccw(c2742.76,-1078.82) 2813.47,-1149.53 2813.94,-1149.06 2813.94,-1496.63 cw(c2713.94,-1496.63) 2784.66,-1567.34 2454.29,-1897.71 cw(c2383.58,-1827) 2383.58,-1927 1383,-1927 ccw(c1383,-1934.24) 1377.88,-1929.12 1375,-1932 ccw(c1384.66,-1941.66) 1371,-1941.66 1371,-2046
GND on Top Layer "Top Layer-No Net" (solid, pour order 48): 0,0 3807,0 3807,-3056 0,-3056
GND on Bottom Layer "Top Layer-No Net" (solid, pour order 46): 0,0 3807,0 3807,-3056 0,-3056

## Other copper
Top Layer:
  region net GND: 1492.68,-824.51 1475.94,-811.9 1442.32,-856.52 1459.05,-869.13
  region net GND: 1042.68,-824.51 1025.94,-811.9 992.32,-856.52 1009.05,-869.13
  region net GND: 1459.68,-917.51 1442.94,-904.9 1409.32,-949.52 1426.05,-962.13
  region net GND: 1470.89,-962.14 1488.06,-950.13 1456.01,-904.36 1438.85,-916.38
  region net GND: 1445.1,-874.89 1462.26,-862.87 1430.22,-817.11 1413.06,-829.13
  region net GND: 1009.68,-917.51 992.94,-904.9 959.32,-949.52 976.05,-962.13
  region net GND: 1020.89,-962.14 1038.06,-950.13 1006.01,-904.36 988.85,-916.38
  region net GND: 995.1,-874.89 1012.26,-862.87 980.22,-817.11 963.06,-829.13
  rectangle net GND: 1308.06,-833.13 1598.06,-633.13
  rectangle net GND: 1327.06,-1068.13 1576.06,-931.13
  rectangle net GND: 858.06,-833.13 1148.06,-633.13
  rectangle net GND: 877.06,-1068.13 1126.06,-931.13
  region net GND: 536.04,-875.76 553.21,-863.74 521.16,-817.98 504,-830
  region net GND: 583.62,-825.38 566.89,-812.77 533.27,-857.39 550,-870
  region net GND: 561.84,-963.02 579,-951 546.96,-905.24 529.79,-917.26
  region net GND: 550.62,-918.38 533.89,-905.77 500.27,-950.39 517,-963
  rectangle net GND: 418,-1069 667,-932
  rectangle net GND: 399,-834 689,-634
  rectangle net GND: 2670,-569 2715,-523
  rectangle net GND: 2785,-513 2830,-472
  rectangle net NetC19_2: 2725,-516 2779,-475
  rectangle net NetC20_2: 2716,-466 2766,-424
  rectangle net GND: 2662,-467 2710,-421
  rectangle net NetC21_2: 2729,-419 2773,-380
  rectangle net GND: 2780,-419 2827,-375
  rectangle net GND: 2673,-384 2719,-337
  rectangle net NetC22_2: 2724,-375 2770,-331
  rectangle net NetC21_2: 2735,-416 2766,-384
  rectangle net NetC20_2: 2727,-462 2759,-431
  rectangle net NetC19_2: 2736,-511 2766,-480
  rectangle net NetC9_1: 2728,-558 2759,-526
  rectangle net NetC17_2: 2052,-909 2094,-863
  rectangle net NetC16_2: 2010,-915 2046,-868
  rectangle net NetC15_2: 1961,-910 2000,-867
  rectangle net NetC7_2: 1906,-914 1948,-871
  rectangle net GND: 1901,-856 1947,-813
  rectangle net NetC18_2: 2098,-911 2140,-868
  rectangle net GND: 2001,-855 2047,-812
  rectangle net GND: 2102,-860 2148,-817
  rectangle net GND: 2052,-965 2098,-922
  rectangle net GND: 1960,-967 2006,-924
  rectangle net VCC: 0,-3056 1056,-2562
  pour cut-out: 2637,-294 2863,-294 ccw(c2865.41,-296.41) 2862,-296.41 2862,-591 2637,-591
  pour cut-out: 1843,-768 2187.59,-768 cw(c2187.59,-771.41) 2190,-769 2190,-1008 1843,-1008
  pour cut-out: 1372,-835 1531,-835 1531,-929 cw(c1526.17,-924.17) 1526.17,-931 1372,-931
  pour cut-out: 921,-838 1079,-838 cw(c1076.59,-840.41) 1080,-840.41 1080,-926 921,-926
  pour cut-out: 463,-837 614.17,-837 cw(c614.17,-843.83) 619,-839 619,-929 cw(c609.34,-919.34) 609.34,-933 463,-933
Bottom Layer:
  rectangle net NetC19_2: 2723,-514 2775,-473
  rectangle net NetC20_2: 2715,-466 2766,-424
  rectangle net NetC21_2: 2724,-422 2776,-377
  rectangle net NetC22_2: 2725,-374 2769,-333
  rectangle net NetC15_2: 1957,-912 2002,-866
  rectangle net NetC16_2: 2010,-916 2048,-868
  rectangle net NetC17_2: 2053,-911 2094,-862
  rectangle net NetC18_2: 2101,-910 2142,-866

## Silkscreen, mask and mechanical layers (free items; w line width, h text height)
Top Overlay:
  text "VCC" at 359,-2473 h60
  text "GND" at 2504,-2569 h60
Top Solder:
  rectangle: 2632,-584 2857,-287
  rectangle: 1843,-1008 2190,-768
  rectangle: 2098,-913 2140,-870
  rectangle: 2052,-909 2094,-863
  rectangle: 2010,-915 2046,-868
  rectangle: 1961,-910 2000,-867
  rectangle: 2725,-516 2779,-475
  rectangle: 2716,-470 2766,-424
  rectangle: 2729,-419 2773,-380
  rectangle: 2724,-375 2770,-331
  rectangle: -5,-3054 1056,-2560
  rectangle: 1776,-3054 3799,-2625
Bottom Solder:
  rectangle: 1214,-2439 1605,-2028
  rectangle: 2610.94,-1074.2 2915.94,-771.2
  rectangle: 348,-1143 1673,-595
Mechanical 1:
  lines w10: 0,-3056 0,0 3,0 3807,0 3807,-897 3807,-3056 0,-3056

## Text inside footprints (layer, text, board x,y; h text height)
SW1: Top Overlay "ON" at 1450,-1788.16 h20 r180
U1: Top Overlay "*" at 2632,-809 h20; Mechanical 13 "*" at 2703.26,-902.02 h20
U3: Top Overlay "*" at 1312.06,-2266.52 h50 r90